# Altium PCB electrionic_sys_pcb.PcbDoc
Units mil, origin at the board's own origin, x right, y up, seen from the top; angles counter-clockwise.
Board outline 1675 x 1410 mil, 2 copper layers (Top Layer, Bottom Layer); 27 components, 15 nets, 84 pads, 31 vias.
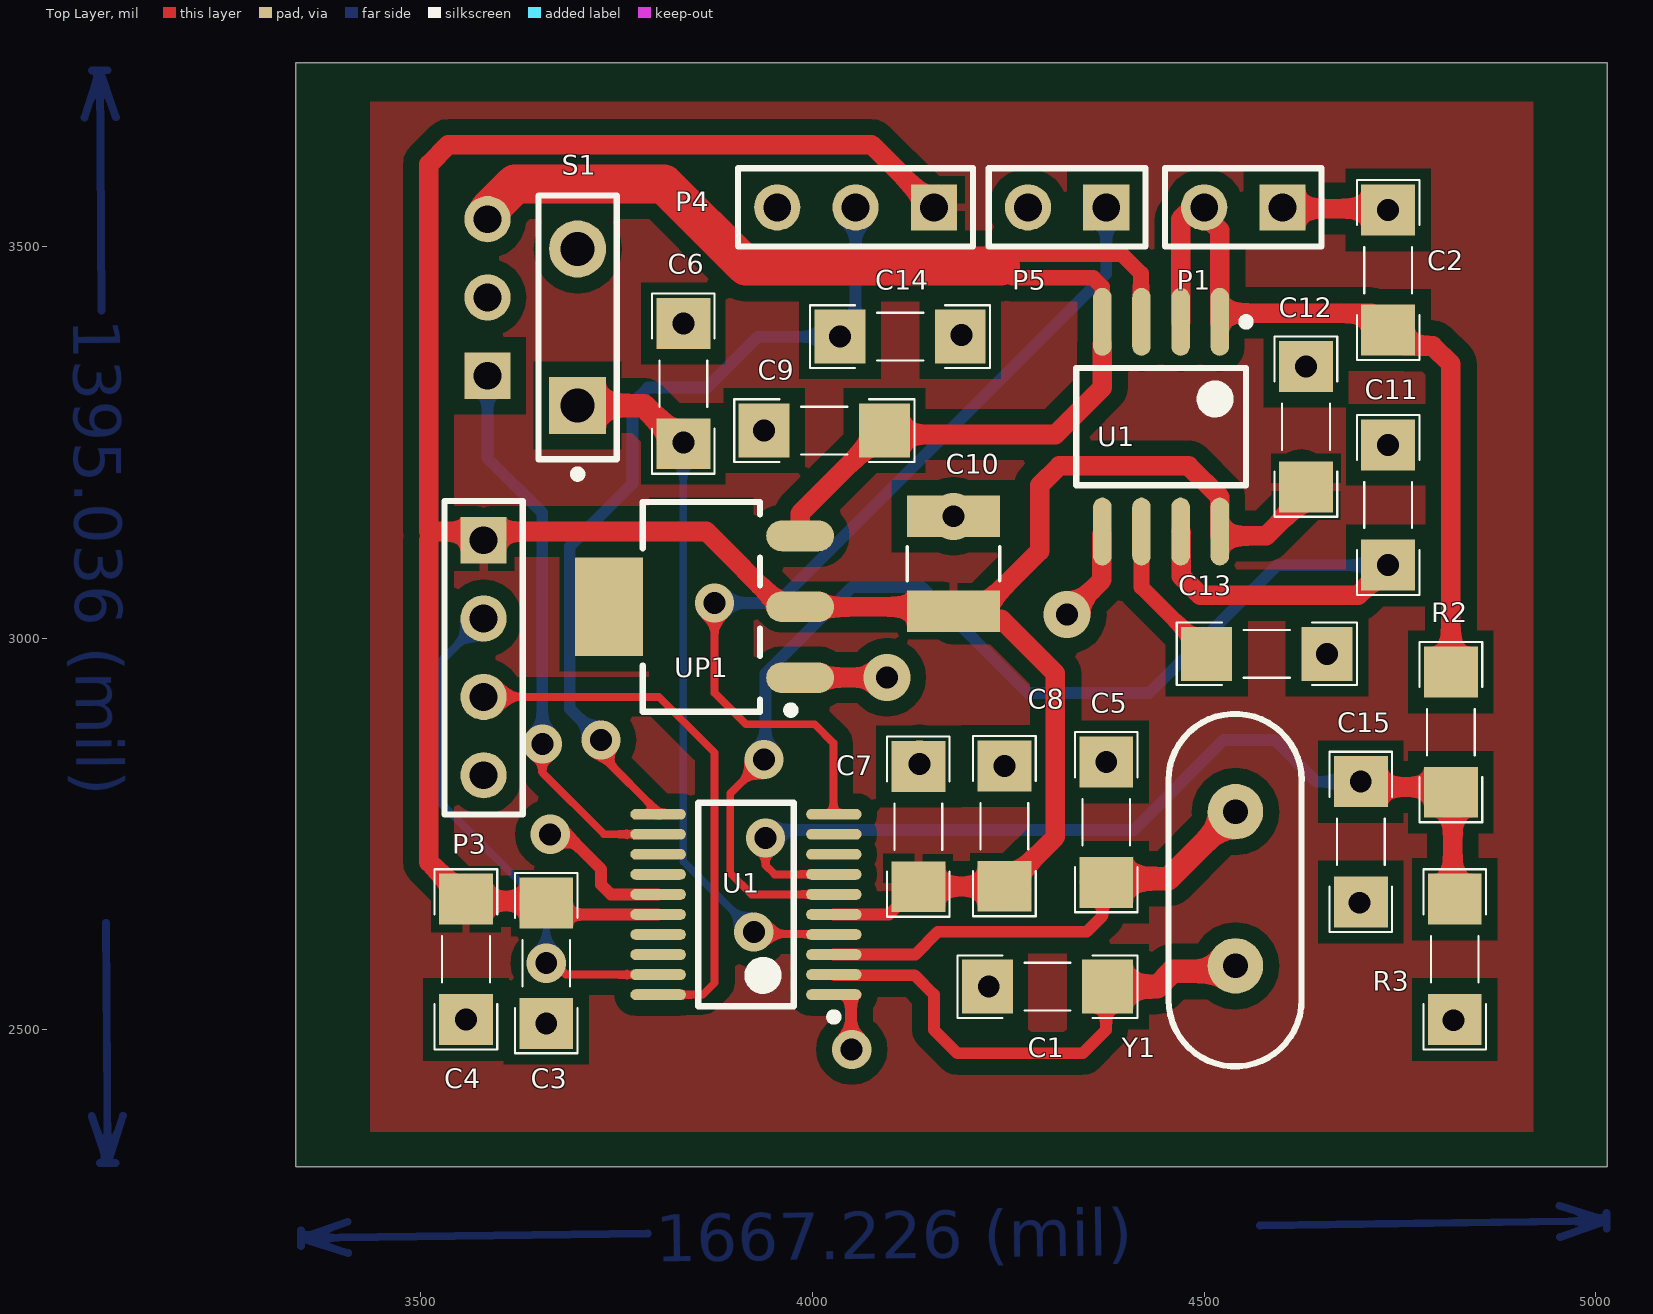
[diagram p0: Top Layer view]
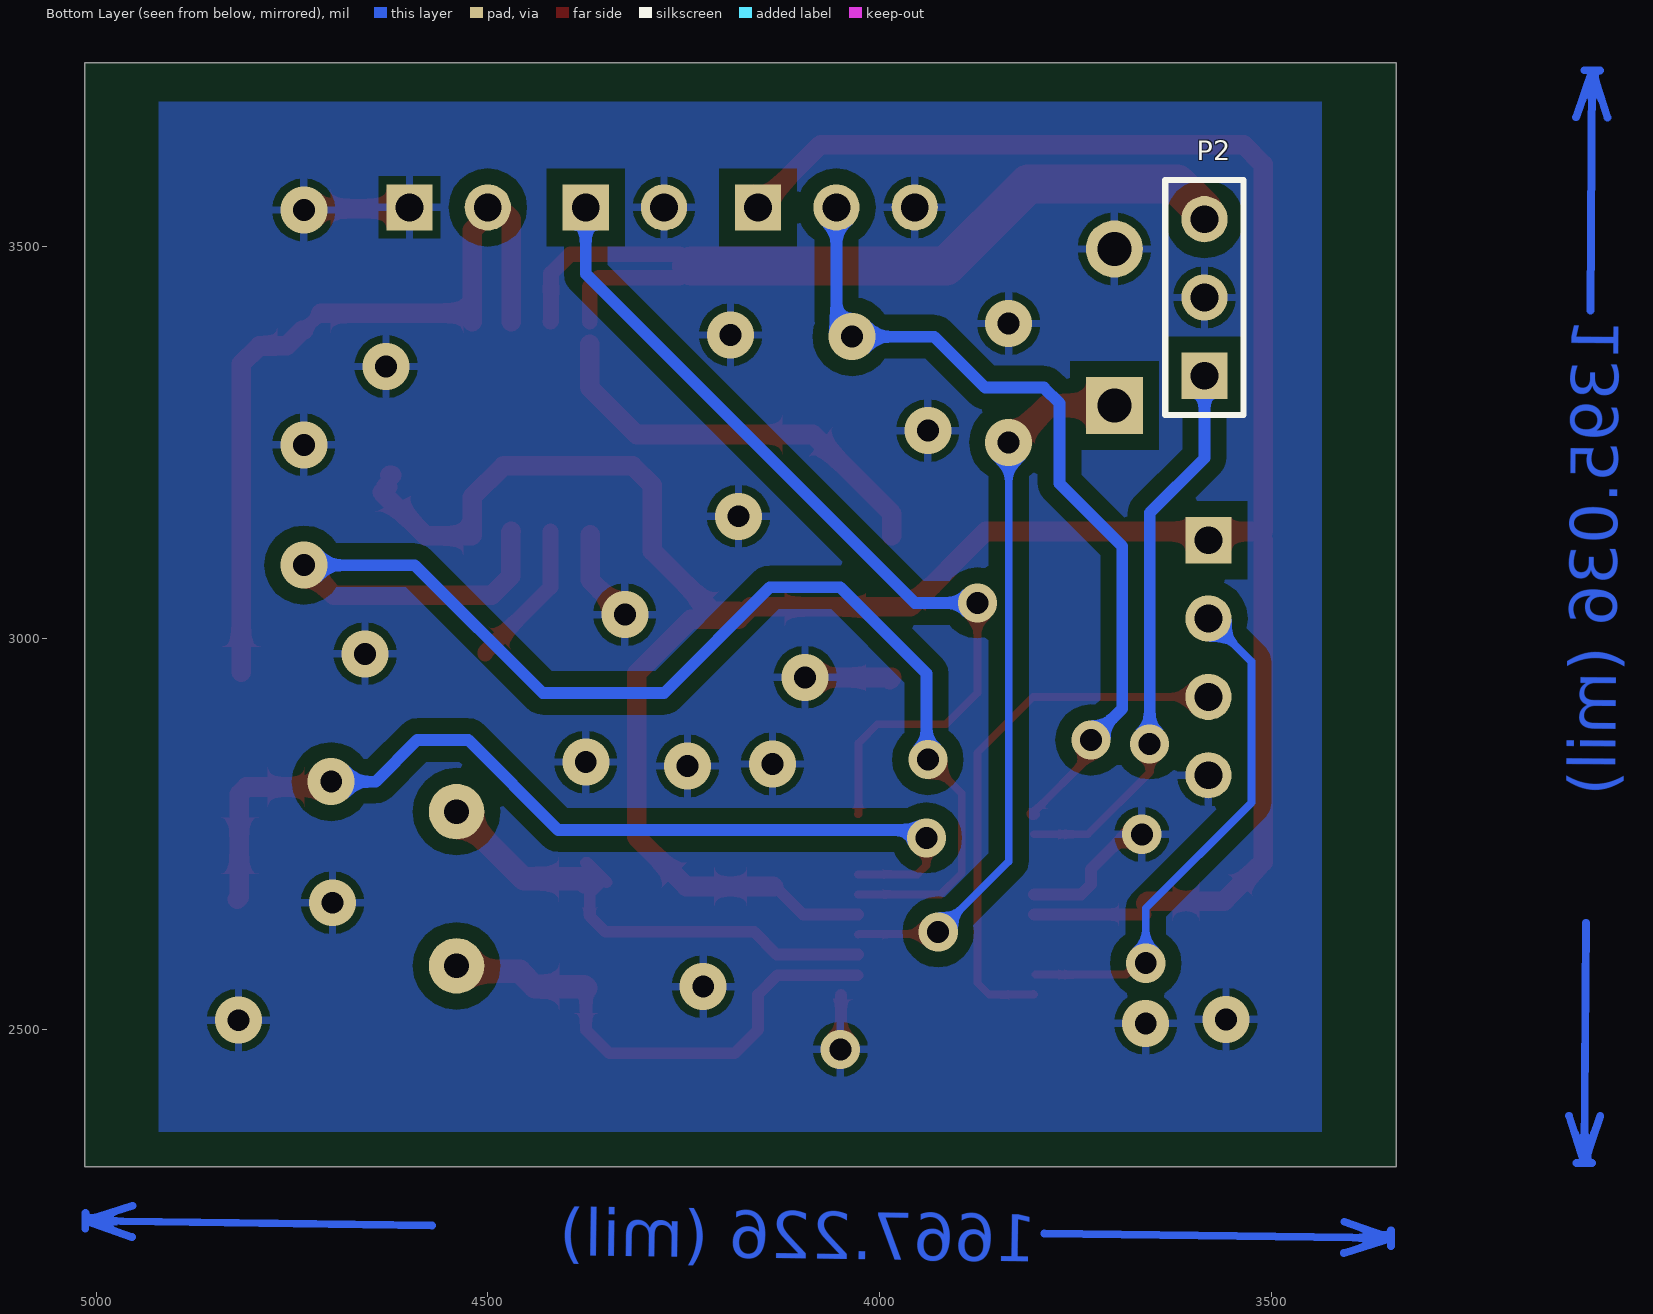
[diagram p1: Bottom Layer view, seen from below]
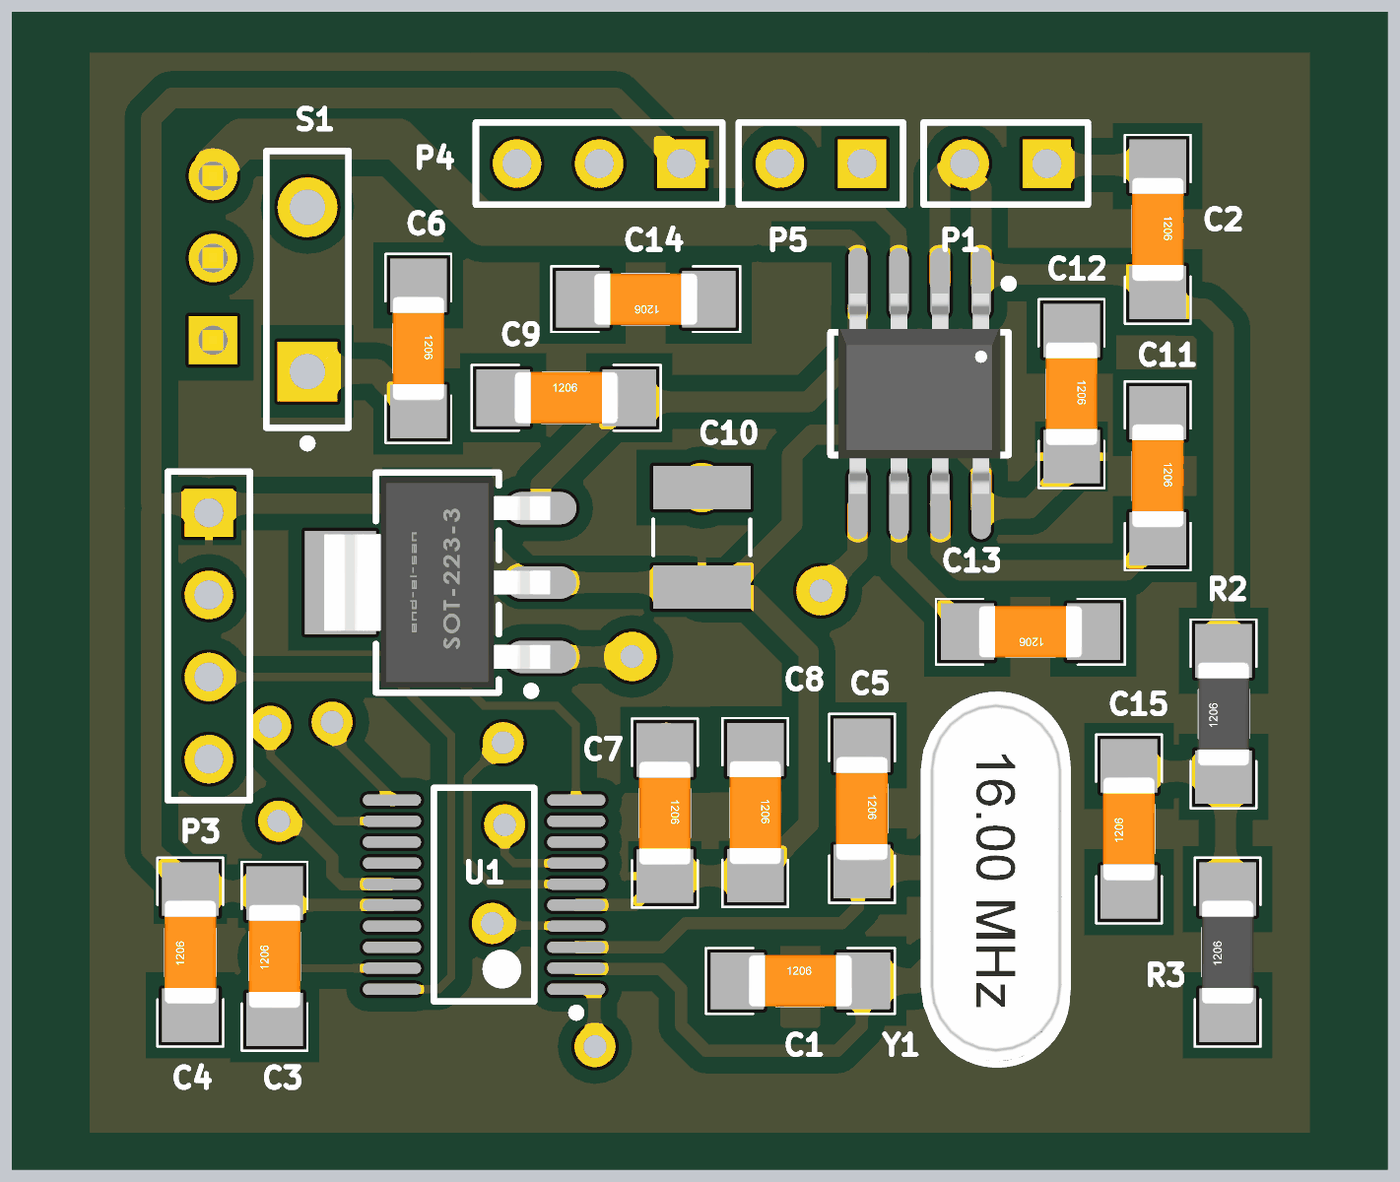
[diagram p2: 3D render of the assembled board from above, using the file's embedded part models]

## Layer stack, top to bottom
Top Solder: solder mask 0.4, Solder Resist, Dk 3.5
Top Layer: signal copper 1.4
Dielectric 1: dielectric 12.6, FR-4, Dk 4.8
Bottom Layer: signal copper 1.4
Bottom Solder: solder mask 0.4, Solder Resist, Dk 3.5

## Board outline
3340,2325 5015,2325 5015,3735 3340,3735

## Design rules (kind name [scope] priority, off if disabled: settings)
Clearance [All] p1: gap=10 ignorepadtopadclearanceinfootprint=FALSE except(0: Arc-Hole Track-Hole SMDPad-Hole THPad-Hole Via-Hole Fill-Hole Poly-Hole Region-Hole Text-Hole; 20: Track-Poly SMDPad-Poly THPad-Poly Via-Poly)
MinimumSolderMaskSliver [All] p1: minsoldermaskwidth=5
PolygonConnect [All] p1: connectstyle=Relief reliefconductorwidth=10 reliefentries=4 polygonreliefangle="90 Angle" airgapwidth=10
RoutingVias [All] p1: holewidth=28 width=50 viastyle="Through Hole" minholewidth=28 minwidth=50 maxholewidth=28 maxwidth=50
SilkToSolderMaskClearance [IsPad] p1: minsilkscreentomaskgap=2 clearancetoexposedcopper=TRUE
SolderMaskExpansion [All] p1: expansion=4
Width [All] p1: maxlimit=100 minlimit=10 preferedwidth=10
28 further rules are at their usual default settings.

## Components (designator, comment, footprint, x,y, rotation, side; value= is the part's Value field where it differs from the comment)
C1 "22pF" CAPC4817X12N 4300,2555 r0 top
C2 "10uF" CAPC4817X12N 4735,3470 r270 top
C3 "100nF" CAPC4817X12N 3660,2585 r90 top
C4 "4.7uF" CAPC4817X12N 3557.47,2590 r90 top
C5 "22pF" CAPC4817X12N 4375,2765 r270 top
C6 "100nF" CAPC4817X12N 3835,3325 r270 top
C7 "10uF" CAPC4817X12N 4135,2759.32 r270 top
C8 "10nF" CAPC4817X12N 4245,2760 r270 top
C9 "10uF" CAPC4817X12N 4015,3265 r0 top
C10 "20uF" CAPPC3528X210N 4180,3095 r90 top
C11 "1nF" CAPC4817X12N 4735,3170 r270 top
C12 "10nF" CAPC4817X12N 4630,3270 r270 top
C13 "10nF" CAPC4817X12N 4580,2980 r180 top
C14 "1nF" CAPC4817X12N 4111.77,3385 r180 top
C15 "1nF" CAPC4817X12N 4700,2740 r90 top
P1 "Header 2" HDR1X2 4600,3550 r180 top
P2 "Header 3" HDR1X3 3585,3335 r90 bottom
P3 "Header 4" HDR1X4 3580,3125 r270 top
P4 "Header 3" HDR1X3 4155,3550 r180 top
P5 "Header 2" HDR1X2 4375,3550 r180 top
R2 "100K" RESC4817X04N 4815,2880 r90 top
R3 "100K" RESC4817X04N 4820,2590 r90 top
S1 "SW-PB" SPST-2 3700,3396.9 r90 top
U1 "ACS712-20A" 8S2_N 4445,3270 r270 top
U1 "STM32F030F4P6" STM-TSSOP20_N 3915,2660 r180 top
UP1 "3V3" SOT223 3858.11,3040 r180 top
Y1 "12 MHz" "XTAL 16MHZ" 4540,2680 r270 top

## Footprints (in the part's own frame and the unit in brackets; to place one, negate y for a bottom-side part, rotate by r counter-clockwise, add the part's x,y. Pads: shape width x height; smd on the part's side, far side on the other; paste and mask are expansions set on the pad)
8S2_N [mm] "SOP, 8-Leads, Body 5.3x5.3mm, Pitch 1.27mm, IPC Medium Density"
  oval 2.2x0.6 smd: 1(-3.4,1.905) 2(-3.4,0.635) 3(-3.4,-0.635) 4(-3.4,-1.905) 5(3.4,-1.905) 6(3.4,-0.635) 7(3.4,0.635) 8(3.4,1.905)
  silkscreen extent -3.52,-2.75 1.9,2.88, body extent -3.1,-2.5 3.1,2.5, height 1.75
CAPC4817X12N [mm] "Chip Capacitor, 2-Leads, Body 4/80x1/70mm, IPC Medium Density-Design:Abbas Basereh"
  rect 1.65x1.75 smd: 1(-1.95,0) 2(1.95,0)
  silkscreen extent -2.92,-1.02 2.92,1.02, body extent -1.6,-0.8 1.6,0.8, height 1
CAPPC3528X210N [mm]
  rect 1.34x3.02 smd: 1(-1.54,0) 2(1.54,0)
  silkscreen extent -0.55,-1.5 0.55,1.5
HDR1X2 [mm] "Connector; Header; 2 Position"
  rect 1.5x1.5 hole 0.9: 1(0,0)
  round 1.5 hole 0.9: 2(2.54,0)
  silkscreen extent -1.27,-1.27 3.81,1.27
HDR1X3 [mm] "Connector; Header; 3 Position"
  rect 1.5x1.5 hole 0.9: 1(0,0)
  round 1.5 hole 0.9: 2(2.54,0) 3(5.08,0)
  silkscreen extent -1.27,-1.27 6.35,1.27, body extent -1.26,-1.27 6.36,1.27, height 8.38
HDR1X4 [mm] "Connector; Header; 4 Position"
  rect 1.5x1.5 hole 0.9: 1(0,0)
  round 1.5 hole 0.9: 2(2.54,0) 3(5.08,0) 4(7.62,0)
  silkscreen extent -1.27,-1.27 8.89,1.27
RESC4817X04N [mm] "Chip Resistor, 2-Leads, Body 4/80x1/70mm, IPC Medium Density-Design:Abbas Basereh"
  rect 1.65x1.75 smd: 1(-1.95,0) 2(1.95,0)
  silkscreen extent -2.92,-1.02 2.92,1.02, body extent -1.6,-0.8 1.6,0.8, height 1
SOT223 [mm] "SOT223, 4-Leads, Body 6.5x3.5mm, Pitch 2.30mm-Designer Abbas Basereh"
  oval 2.2x1 smd: 1(-3.2,2.3) 2(-3.2,0) 3(-3.2,-2.3)
  rect 2.2x3.2 smd: 4(3,0)
  Top Layer pour cut-out: -1.7,3.556 1.7,3.556 1.7,-3.556 -1.7,-3.556
  silkscreen extent -3.03,-3.4 1.9,3.47, body extent -3.5,-3.25 3.5,3.25, height 1.7
SPST-2 [mm] "Switch; 2 Leads"
  rect 1.85x1.85 hole 1.1: 1(-2.54,0)
  round 1.85 hole 1.1: 2(2.54,0)
  silkscreen extent -4.89,-1.27 4.28,1.27
STM-TSSOP20_N [mm] "SOP, 20-Leads, Body 6.6x4.5mm, Pitch 0.65mm, IPC Medium Density"
  oval 1.8x0.35 smd: 1(-2.85,2.925) 2(-2.85,2.275) 3(-2.85,1.625) 4(-2.85,0.975) 5(-2.85,0.325) 6(-2.85,-0.325) 7(-2.85,-0.975) 8(-2.85,-1.625) 9(-2.85,-2.275) 10(-2.85,-2.925) 11(2.85,-2.925) 12(2.85,-2.275) 13(2.85,-1.625) 14(2.85,-0.975) 15(2.85,-0.325) 16(2.85,0.325) 17(2.85,0.975) 18(2.85,1.625) 19(2.85,2.275) 20(2.85,2.925)
  silkscreen extent -2.98,-3.3 1.55,3.77, body extent -2.25,-3.3 2.25,3.3, height 1.2
"XTAL 16MHZ" [mm] "Crystal Oscillator"
  round 1.8 hole 0.8: 1(-2.5,0) 2(2.5,0)
  silkscreen extent -5.67,-2.18 5.76,2.15, body extent -5.68,-2.38 5.67,2.27, height 0.99

## Part data
C1 C2 C3 C4 C5 C6 C7 C8 C9 C11 C12 C13 C14 C15: library part "CAP SMD 1206", "CAP 1206", Data=16-12-2016, Desc.="CAP SMD 1206", Designer="Abbas Basereh"
C10: library part TAJB226M006RNJ, "22µF Molded Tantalum Capacitors 6.3V 1411 _3528 Metric_, 1210", Package="1210 AVX", Availability=Unavailable, MF=AVX, MP=TAJB226M006RNJ, Price=None, SnapEDA_Link=https://www.snapeda.com/parts/TAJB226M006RNJ/AVX/view-part/1683421/?ref=snap
P1 P5: "Header, 2-Pin", LatestRevisionDate=17-Jul-2002, LatestRevisionNote="Re-released for DXP Platform.", Publisher="Altium Limited"
P2 P4: "Header, 3-Pin", LatestRevisionDate=17-Jul-2002, LatestRevisionNote="Re-released for DXP Platform.", Publisher="Altium Limited"
  P2: System=Connector
P3: "Header, 4-Pin", LatestRevisionDate=17-Jul-2002, LatestRevisionNote="Re-released for DXP Platform.", Publisher="Altium Limited"
R2 R3: library part "RES 1206 0.25W", "RES 1206", Data=16-12-2016, Desc.="RES SMD 1206", Designer="Abbas Basereh"
S1: "Switch", LatestRevisionDate=17-Jul-2002, LatestRevisionNote="Re-released for DXP Platform.", PackageDescription="Switch; 2 Leads", PackageReference=SPST-2, Published=24-Mar-1999, Publisher="Altium Limited"
U1: library part ACS712ELCTR-20A-T, "Fully Integrated, Hall Effect-Based Linear Current Sensor IC  with 2.1 kVRMS Isolation and a Low-Resistance Current Conductor", ComponentAvailability="Not recommended for new design.", ComponentLink4Description=http://www.allegromicro.com/, ComponentLink4URL=http://www.allegromicro.com/, DatasheetVersion="Copyright ©2006-2013, Allegro MicroSystems, LLC", PackageDescription="8-Lead, 0.208\" Body, Plastic Small Outline Package (EIAJ)", PackageReference="8 Lead SOIC", PackageVersion="revF, Apr-2008", Published=2017-1-15, Publisher="Abbas Basereh", Supplier 1=Digi-Key, Supplier 2=Farnell, Supplier 3=Mouser, Supplier Part Number 1=ACS712ELCTR-20A-T
U1: "ARM Cortex-M0 32-bit MCU, 16 KB Flash, 4 KB Internal RAM, 15 I/Os, 20-pin TSSOP, -40 to 85 degC, Tube", I/Os (High Current)=15, Operating Frequency(F) (Processor speed) (MHz)=48, Supplier Part Number 1=497-14044-5-ND, Supply Voltage(Vcc) min (V)=2.4, ComponentLink1Description="Manufacturer URL", ComponentLink1URL=http://www.st.com/web/en/home.html, ComponentLink2Description=Datasheet, ComponentLink2URL=http://www.st.com/st-web-ui/static/active/en/resource/technical/document/datasheet/DM00088500.pdf, ComponentLink3Description="Package Specification", ComponentLink3URL=http://www.st.com/st-web-ui/static/active/en/resource/technical/document/datasheet/DM00065136.pdf, Core="ARM Cortex-M0", DatasheetVersion="Rev. 1", FLASH Size (Prog) (kB)=16, Internal RAM Size (kB)=4, Mounting Technology="Surface Mount", PackageDescription="20-Pin Thin Shrink Small Outline Package, 6.5 x 4.4 mm Body, 0.65 mm Pitch", PackageReference=TSSOP20, PackageVersion="Rev. 1, 11/2012", Packing=Tube, PartNumber=STM32F030F4P6, Supplier 1=Digi-Key, Supplier 2=Newark, Supplier 3=Mouser, Supplier Part Number 2=06X3648, Supplier Part Number 3=511-STM32F030F4P6
UP1: library part AMS1117-x.x, "x.x Volt, 800mA Low-Dropout Linear Regulator, 4-pin SOT-223", Data=16-12-2016, Designer="Ali Hafizi"
Y1: library part XTAL, "XTAL Crystal", ComponentLink1Description=Datasheet, ComponentLink2Description=Reference, Design Date=2017-1-3, Designer="ABBAS BASEREH", Mounting Technology="Surface Mount\Through-Hole", Status=Unreleased

## Via types
v1: diameter 60, hole 28, Top Layer to Bottom Layer, 22 vias
v2: diameter 50, hole 28, Top Layer to Bottom Layer, 9 vias

## Nets (pads, with @x,y where several pads share a name; then routed paths per layer and width w, separated by ;. In a path a pad name is that pad's centre, name@x,y a point inside that pad or via, vN(x,y) a via of type N, cw(c..) or ccw(c..) an arc to the next point about the centre after c; other vN are vias at no path point)
3.3: C3.2 C4.2 C7.2 C8.2 C10.1 C12.2 P3.1 P4.1 U1.5@4027.2,2647.2 U1.8@4520,3136.14 U1.16 UP1.2 | length 3982.9
  Top Layer w15: C3.2@3660,2647.2 3800.83,2647.2 U1.16 ; U1.5@4027.2,2647.2 4029.17,2647.2 4097.69,2647.2 4133.03,2682.55 C7.2
  Top Layer w25: 3510,3125 3510,2714.24 C4.2 3559.97,2664.27 3657.5,2664.27 C3.2 ; C7.2 4135.34,2682.89 4246.63,2682.89 4310,2746.26 4310,2955 4240.63,3024.37 4180,3024.37 4164.37,3040 UP1.2 3960.47,3040 3864.33,3136.14 3591.14,3136.14 P3.1 3568.86,3136.14 3510,3136.14 3510,3605 3535,3630 4075,3630 P4.1 ; C10.1 4213.07,3034.37 4290,3111.3 4290,3195 4315,3220 4480,3220 4520,3180 4520,3136.14 4520,3131.24 4520.69,3130.55 4579.29,3130.55 4635,3186.26 4628.03,3193.23 C12.2 ; C12.2@4623.03,3208.23 C12.2@4625,3208.23
filter: C13.2 U1.6@4420,3136.14 | length 190.6
  Top Layer w20: U1.6@4420,3136.14 4420,3065.2 4503.23,2981.97 C13.2
filterd_output: C11.2 U1.6@4027.2,2672.8 U1.7@4470,3136.14 | length 1714.4
  Top Layer w10: v2(3938.23,2845) 3895,2801.77 3895,2700 3922.2,2672.8 U1.6@4027.2,2672.8
  Top Layer w25: U1.7@4470,3136.14 4470.69,3135.45 4470.69,3079.31 4495,3055 4696.77,3055 C11.2@4725,3083.23
  Bottom Layer w15: v2(3938.23,2845) 3939.78,2846.56 3939.78,2954.78 4050,3065 4140,3065 4275,2930 4430,2930 4593.23,3093.23 v1(4735,3093.23)
GND: C1.1 C2.1 C3.1 C4.1 C5.1 C6.1 C7.1 C8.1 C9.1 C10.2 C11.1 C12.1 C13.1 C14.1 C15.1 P1.1 P2.2 P3.4 P4.3 P5.2 R3.1 S1.2 U1.1@4027.2,2544.84 U1.5@4370,3136.14 U1.15 UP1.1 | length 627.5
  Top Layer w15: v2(3665,2749.57) 3685.43,2749.57 3730,2705 3730,2685 3742.2,2672.8 3800.83,2672.8 U1.15 ; U1.1@4049.12,2544.23 4049.12,2475.88 v2(4050,2475)
  Top Layer w25: UP1.1@3986.84,2946.7 UP1.1 3984.37,2949.72 4094.72,2949.72 v1(4095,2950) ; v1(4325,3030) 4369.31,3074.31 U1.5@4369.31,3132.28 ; P1.1 4601.61,3548.39 4733.39,3548.39 v1(4735,3546.77)
  Bottom Layer w25: P1.1 P1.1@4601.61,3548.39 ; v1@4733.39,3548.39 v1(4735,3546.77)
  other v1: 3660,2508.23 4818.37,2512.16 3557.47,2513.23 4225,2555 4698.37,2662.16 4245,2836.77 4136.63,2839.34 4375,2841.77 4656.77,2980 4180,3155.63 4735,3246.77 3938.23,3265 4630,3346.77 4190.15,3387.16 3835,3401.77
input: C2.2 P1.2 R2.2 U1.1@4520,3403.86 U1.2@4470,3403.86 | length 1029.7
  Top Layer w15: C2.2@4713.23,3415 C2.2
  Top Layer w25: U1.2@4470,3403.86 4470,3535 4485,3550 P1.2 4500,3540.78 4520,3520.78 U1.1@4520,3403.86 ; U1.1@4527.23,3415 C2.2@4713.23,3415 ; C2.2 4736.97,3393.23 4756.95,3373.25 4791.75,3373.25 4815,3350 R2.2
input_pulse: C14.2 P4.2 U1.11 | length 1081
  Top Layer w10: v2(3730,2870) 3730,2850.77 U1.11@3805,2775.77
  Top Layer w15: U1.11 3804.39,2775.16 U1.11@3805,2775.77
  Bottom Layer w15: v2(3730,2870) 3690,2910 3690,3117.42 3770,3197.42 3770,3300 3790,3320 3865,3320 3930,3385 v1(4035,3385) 4055,3405 P4.2
NetC1_2: C1.2 U1.2@4027.2,2570.43 Y1.2 | length 659.3
  Top Layer w15: U1.2@4027.93,2569.71 4130.29,2569.71 4155,2545 4155,2500 4185,2470 4345,2470 4374.8,2499.8 C1.2@4374.8,2553.03
  Top Layer w30: C1.2@4374.8,2553.03 C1.2 4440,2555 4459.57,2574.57 4527.8,2574.57 4537.4,2584.17 Y1.2
NetC5_2: C5.2 U1.3@4027.2,2596.02 Y1.1 | length 670.7
  Top Layer w15: U1.3@4027.2,2596.02 4029.17,2596.02 4131.02,2596.02 4160,2625 4350,2625 4370,2645 4370,2674.25 4356.02,2688.23 C5.2 ; C5.2@4348.05,2688.25 4373.03,2713.23 C5.2@4375,2713.23
  Top Layer w30: C5.2 4379.65,2692.87 4454.45,2692.87 Y1.1
NetC6_2: C6.2 S1.1 U1.4@4027.2,2621.61 | length 925.6
  Top Layer w10: v2(3925,2625) 3927.66,2622.34 4026.48,2622.34 U1.4@4027.2,2621.61
  Top Layer w30: S1.1 3784.36,3296.9 3835,3246.26 v1(3835,3250)
  Bottom Layer w10: v1(3835,3250) 3835,2715 v2(3925,2625)
output_pulse_M: P5.1 U1.10 | length 1143.3
  Top Layer w10: v2(3875,3045) 3875,2930 3915,2890 4002.76,2890 4026.75,2866.01 4026.75,2775.62 U1.10
  Bottom Layer w15: v2(3875,3045) 3955,3045 4375,3465 P5.1
output_pulse_P: P2.1 U1.12 | length 716
  Top Layer w10: v2(3655,2865) 3655,2828.43 3733.86,2749.57 U1.12
  Bottom Layer w15: P2.1 3585,3230 3655,3160 v2(3655,2865)
SWCLK: P3.3 U1.20 | length 697.8
  Top Layer w10: P3.3 3803.73,2925 3875,2853.73 3875,2560 3859.84,2544.84 U1.20 U1.20@3803.52,2545.57
SWIO: P3.2 U1.19 | length 665.6
  Top Layer w10: v2(3660,2585) 3670.82,2585 3685.39,2570.43 U1.19@3800.83,2570.43
  Bottom Layer w10: P3.2 3525,2970 3525,2790 3660,2655 v2(3660,2585)
VCC: C9.2 P2.3 U1.3@4420,3403.86 U1.4@4370,3403.86 UP1.3 | length 1681.1
  Top Layer w20: 4240,3475 4255,3490 4395,3490 4419.31,3465.69 4419.31,3404.55 U1.3@4420,3403.86 ; 4255,3460 4358.28,3460 4370,3448.28 U1.4@4370,3403.86
  Top Layer w25: UP1.3 3984.09,3159.09 4085,3260 4310,3260 4370,3320 U1.4@4370,3375
  Top Layer w50: P2.3 3586.73,3536.73 3586.73,3546.73 3620,3580 3810,3580 3915,3475 4240,3475
voltage_sense: C15.2 R2.1 R3.2 U1.7@4027.2,2698.39 | length 1220
  Top Layer w10: v2(3940,2745) 3940,2710 3951.61,2698.39 U1.7@4027.2,2698.39
  Top Layer w25: v1(4700,2816.77) 4706.77,2810 4808.23,2810 R2.1 4817.5,2800.73 4817.5,2669.27 R3.2
  Bottom Layer w15: v2(3940,2745) 3950,2755 4410,2755 4525,2870 4590,2870 4643.23,2816.77 v1(4700,2816.77)
pads on no net: U1.8@4027.2,2723.98 U1.9 U1.13 U1.14 U1.17 U1.18 UP1.4
copper on no net: | length 2084.7
  Bottom Layer w10: 3070.43,3664.86 3090,3725 ; 3079.57,2389.86 3100,2330 ; 3080,3724.93 3100,3725.07 ; 3090,2329.93 3110,2330.07 ; 3092.2,3418.37 3090,3725 ; 3097.8,2636.63 3100,2330 ; 3110.43,3665.14 3090,3725 ; 3119.57,2390.14 3100,2330 ; 3346.73,2243.98 3346.99,2223.98 ; 3406.59,2254.78 3346.86,2233.98 ; 3407.12,2214.78 3346.86,2233.98 ; 3789.55,2239.86 3346.86,2233.98 ; 4571.24,2250.23 5013.94,2256.11 ; 4953.68,2275.31 5013.94,2256.11 ; 4954.21,2235.32 5013.94,2256.11 ; 5013.81,2266.11 5014.07,2246.11

## Polygon pours and split planes (outlines as drawn)
GND on Bottom Layer "NONET_L02_P008" (solid, pour order 8): 3435,3685 4920,3685 4920,2370 3435,2370
3.3 on Top Layer "3.3_L01_P010" (solid, pour order 10): 3435,3685 4920,3685 4920,2370 3435,2370

## Other copper
Bottom Layer:
  text "1395.036 (mil)" at 3056.28,3408.11 h60 r270.41
  text "1667.226 (mil)" at 3800.03,2204.01 h60 r0.76

## Silkscreen, mask and mechanical layers (free items; w line width, h text height)
Mechanical 1:
  the board outline again, w20